# Altium PCB PCB1.PcbDoc
Units mil, origin at the board's own origin, x right, y up, seen from the top; angles counter-clockwise.
Board outline 2105 x 2180 mil, 2 copper layers (Top Layer, Bottom Layer); 22 components, 12 nets, 50 pads, 5 vias.
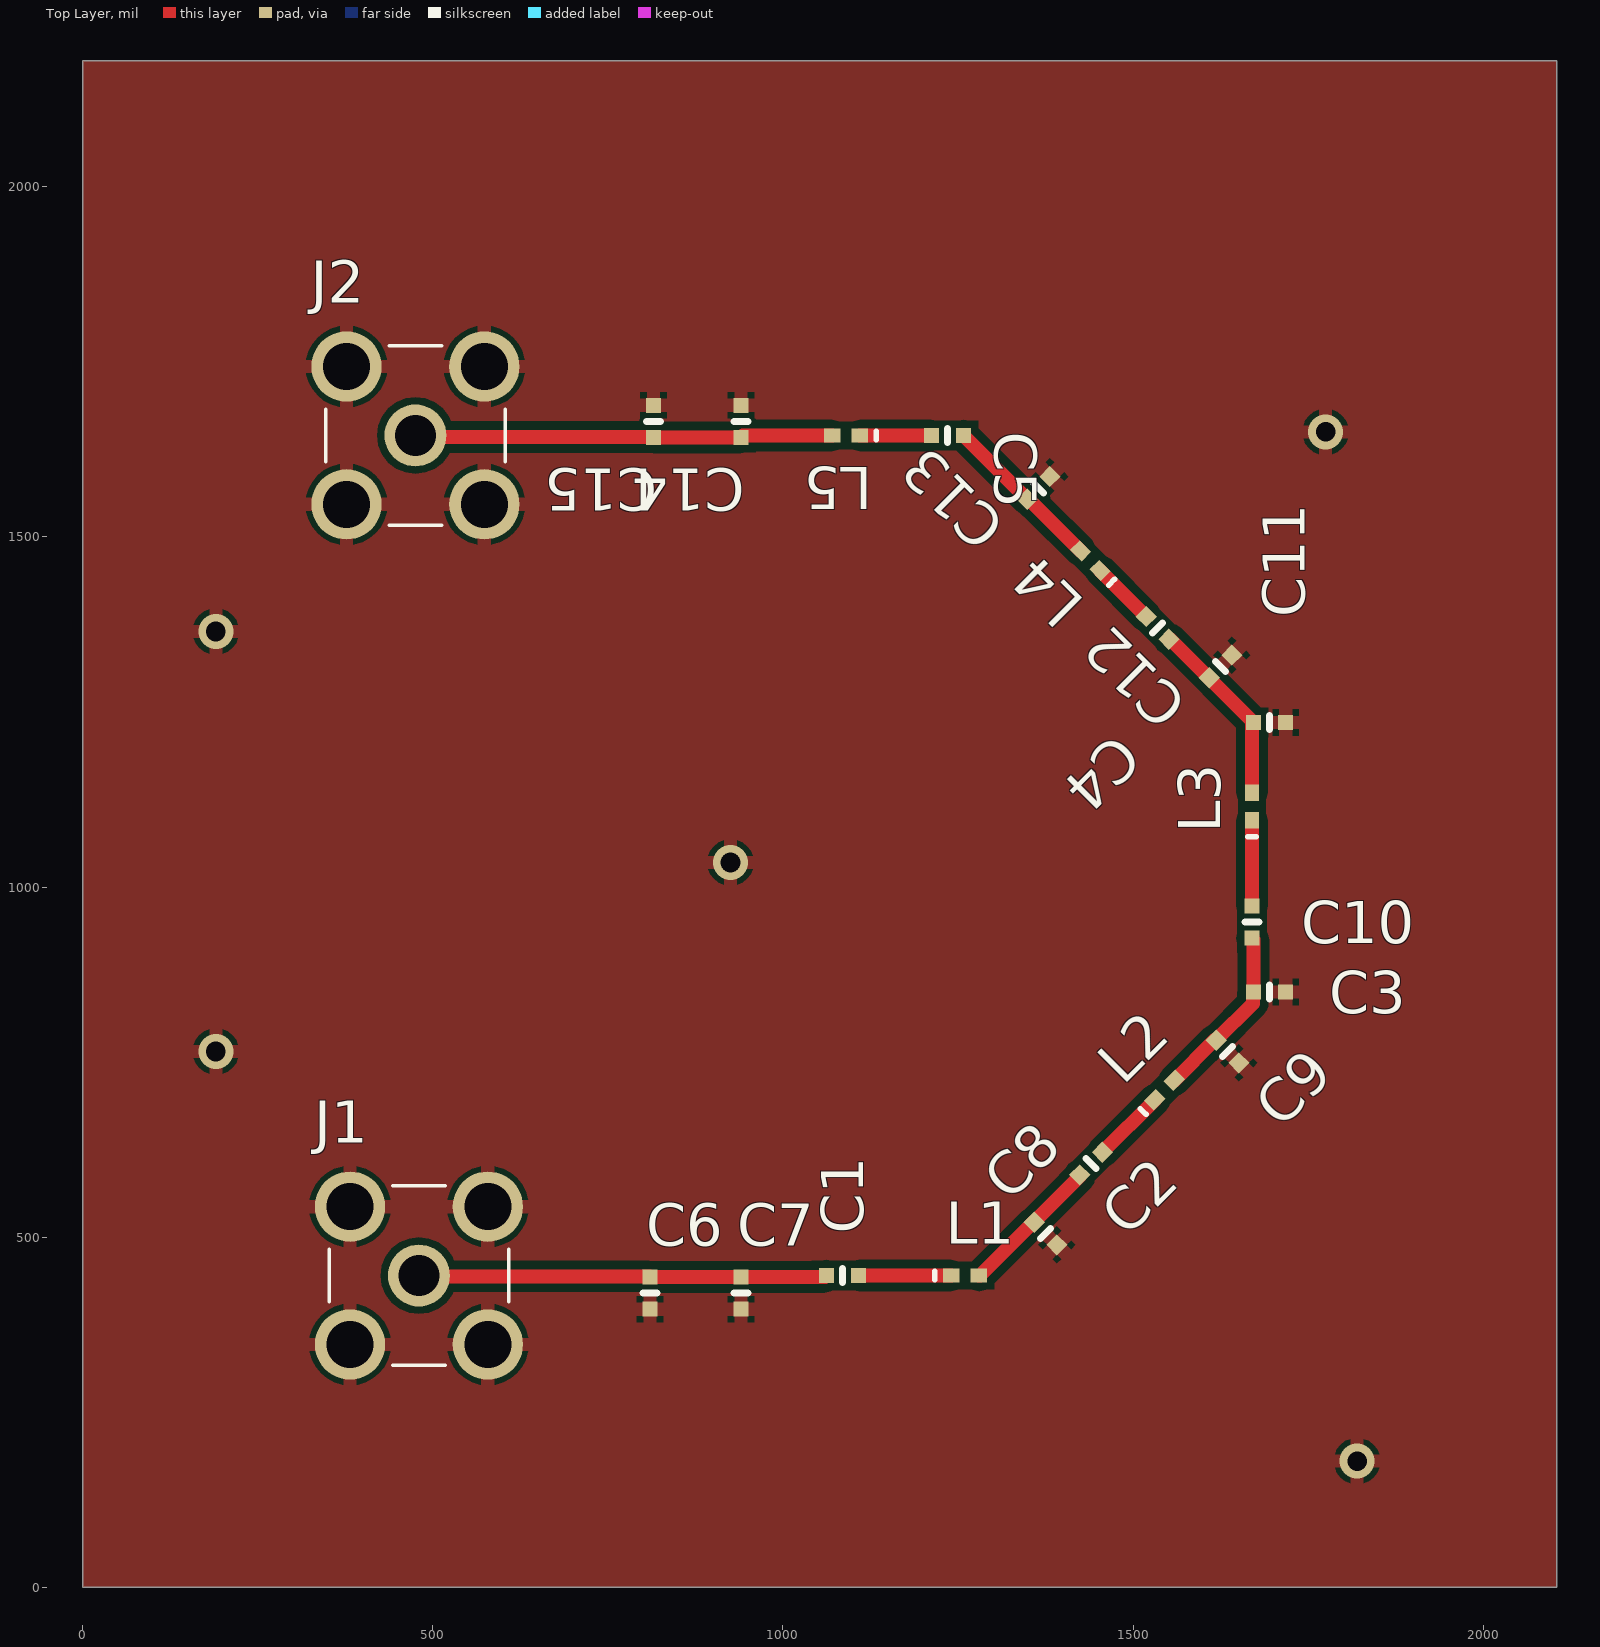
[diagram p0: Top Layer view]
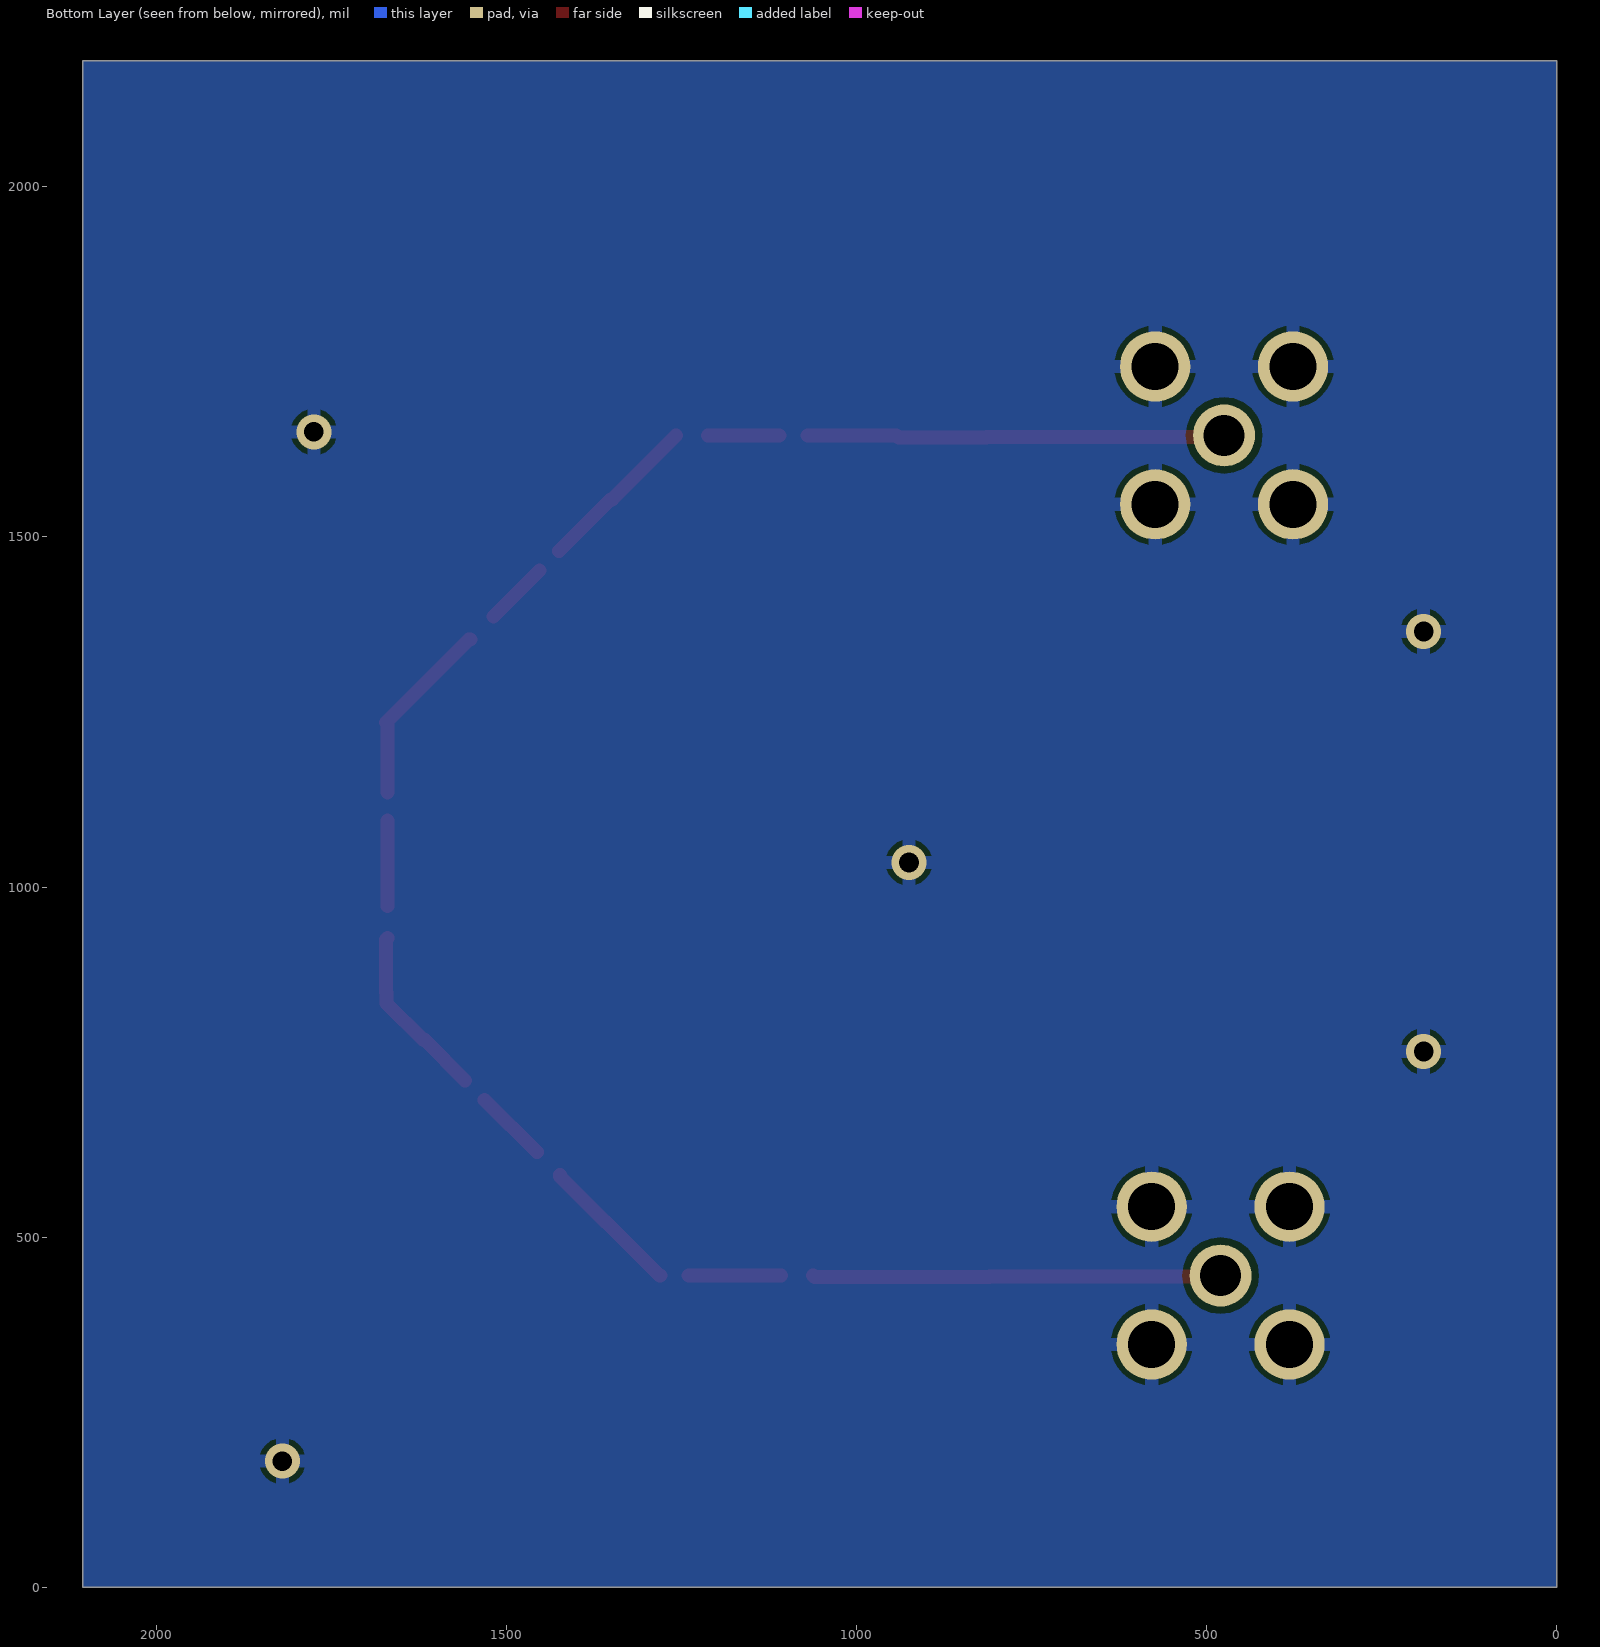
[diagram p1: Bottom Layer view, seen from below]
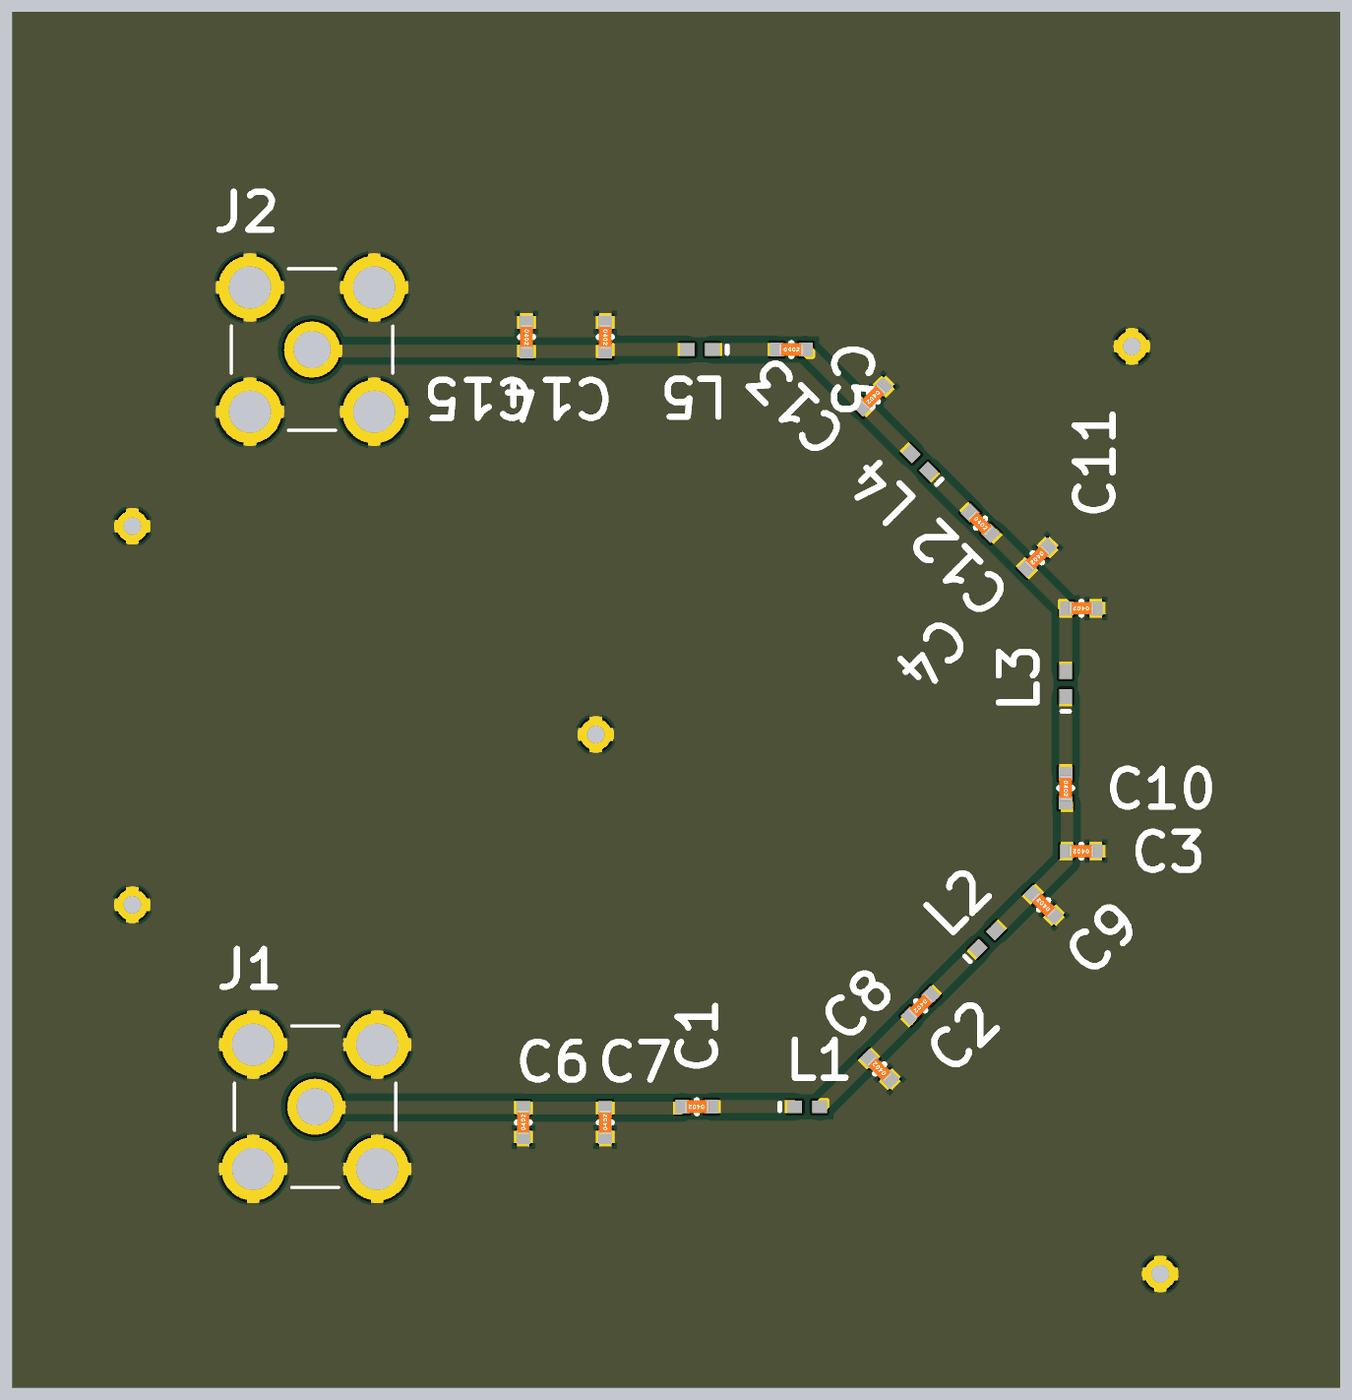
[diagram p2: 3D render of the assembled board from above, using the file's embedded part models]

## Layer stack, top to bottom
Top Solder: solder mask 0.4, Solder Resist, Dk 3.5
Top Layer: signal copper 1.4
Dielectric 1: dielectric 12.6, FR-4, Dk 4.8
Bottom Layer: signal copper 1.4
Bottom Solder: solder mask 0.4, Solder Resist, Dk 3.5

## Board outline
0,0 2105,0 2105,2180 0,2180

## Design rules (kind name [scope] priority, off if disabled: settings)
Clearance [All] p1: gap=10 ignorepadtopadclearanceinfootprint=FALSE except(0: Arc-Hole Track-Hole SMDPad-Hole THPad-Hole Via-Hole Fill-Hole Poly-Hole Region-Hole Text-Hole; 11.81: Arc-Via Arc-Fill Arc-Poly Arc-Region Track-Via Track-Fill Track-Poly Track-Region)
HoleSize [All] p1: absolutevalues=TRUE maxlimit=118.11 minlimit=27.56 maxpercent=80.000 minpercent=20.000
MinimumSolderMaskSliver [All] p1: minsoldermaskwidth=4.92
PlaneConnect [All] p1: planeconnectstyle=Relief reliefexpansion=20 reliefentries=4 reliefconductorwidth=12 reliefairgap=10
PolygonConnect [All] p1: connectstyle=Relief reliefconductorwidth=19.68 reliefentries=4 polygonreliefangle="90 Angle" airgapwidth=7.87
RoutingVias [All] p1: holewidth=27.56 width=62.99 viastyle="Through Hole" minholewidth=27.56 minwidth=62.99 maxholewidth=27.56 maxwidth=62.99
SilkToSilkClearance [All] p1: silktosilkclearance=4.72
SilkToSolderMaskClearance [IsPad] p1: minsilkscreentomaskgap=3.94 clearancetoexposedcopper=TRUE
SolderMaskExpansion [All] p1: expansion=4 istentingtop=FALSE
Width [All] p1: maxlimit=120 minlimit=12 preferedwidth=20
25 further rules are at their usual default settings.

## Components (designator, comment, footprint, x,y, rotation, side; value= is the part's Value field where it differs from the comment)
C1 "33pF" SMD-0402C 1085,445 r90 top
C2 "27pF" SMD-0402C 1440,605 r135 top
C3 "27pF" SMD-0402C 1670,950 r180 top
C4 "27pF" SMD-0402C 1535,1370 r225 top
C5 "33pF" SMD-0402C 1235,1645 r270 top
C6 "100pF" SMD-0402C 810,420 r0 top
C7 "100pF" SMD-0402C 940,420 r0 top
C8 "2.7nF" SMD-0402C 1375,505 r45 top value=2700pF
C9 "1.5nF" SMD-0402C 1695,850 r90 top value=1500pF
C10 "1.5nF" SMD-0402C 1635,765 r45 top value=1500pF
C11 "1.5nF" SMD-0402C 1695,1235 r90 top value=1500pF
C12 "1.5nF" SMD-0402C 1625,1315 r135 top value=1500pF
C13 "2.7nF" SMD-0402C 1365,1570 r135 top value=2700pF
C14 "100pF" SMD-0402C 940,1665 r180 top
C15 "100pF" SMD-0402C 815,1665 r180 top
J1 "IN" LPRS_SMACONNECTOR 480,445 r0 top
J2 "OUT" LPRS_SMACONNECTOR 475,1645 r0 top
L1 "10nH" 0402-A 1260,445 r0 top value=10mH
L2 "10nH" 0402-A 1545,710 r45 top value=10mH
L3 "10nH" 0402-A 1670,1115 r90 top value=10mH
L4 "10nH" 0402-A 1438.92,1466.08 r135 top value=10mH
L5 "10nH" 0402-A 1090,1645 r180 top value=10mH

## Footprints (in the part's own frame and the unit in brackets; to place one, negate y for a bottom-side part, rotate by r counter-clockwise, add the part's x,y. Pads: shape width x height; smd on the part's side, far side on the other; paste and mask are expansions set on the pad)
0402-A [mm] "Chip Inductor, Body 1.0x0.5mm, IPC High Density"
  rect 0.6x0.5 smd: 1(-0.5,0) 2(0.5,0)
  silkscreen extent -1.1,-0.15 -1.1,0.15, body extent -0.55,-0.3 0.55,0.3, height 0.55
LPRS_SMACONNECTOR [mm]
  round 2.25 hole 1.5: 1(0,0)
  round 2.55 hole 1.7: 2(2.5,2.5) 3(2.5,-2.5) 4(-2.5,-2.5) 5(-2.5,2.5)
  silkscreen extent -3.25,-3.25 3.25,3.25
SMD-0402C [mm]
  rect 0.55x0.55 smd: 1(0,0.584) 2(0,-0.584)
  silkscreen extent -0.25,0 0.25,0, body extent -0.25,-0.51 0.25,0.51, height 0.51

## Part data
C1 C5: library part GCM1555C1H330JA16D, "CAP CER 33PF 50V NP0 0402", Digi-Key Part Number=490-11148-1-ND, Manufacturer="Murata Electronics North America", Operating Temperature="-55°C ~ 125°C", Package / Case="0402 (1005 Metric)", Ratings=AEC-Q200, Temperature Coefficient="C0G, NP0", Tolerance=±5%, Voltage=50V, @ qty=0, Applications=Automotive, Datasheets=http://www.murata.com/~/media/webrenewal/support/library/catalog/products/capacitor/mlcc/c03e.ashx, Factory Stock=0, Features=-, Height - Seated (Max)=-, Image=//media.digikey.com/Renders/Murata%20Renders/ZRB-SERIES-0402.jpg, Lead Spacing=-, Lead Style=-, Minimum Quantity=1, Mounting Type="Surface Mount, MLCC", Packaging="Cut Tape (CT)", Part Number=GCM1555C1H330JA16D, Part Status=Active, Quantity Available=57000, Series=GCM, Size / Dimension="0.039\" L x 0.020\" W (1.00mm x 0.50mm)", Thickness (Max)="0.022\" (0.55mm)", Unit Price (USD)=0.1
C2 C3 C4: library part GCM1555C1H270JA16D, "CAP CER 27PF 50V NP0 0402", Digi-Key Part Number=490-12651-1-ND, Manufacturer="Murata Electronics North America", Operating Temperature="-55°C ~ 125°C", Package / Case="0402 (1005 Metric)", Ratings=AEC-Q200, Temperature Coefficient="C0G, NP0", Tolerance=±5%, Voltage=50V, @ qty=0, Applications=Automotive, Datasheets=http://www.murata.com/~/media/webrenewal/support/library/catalog/products/capacitor/mlcc/c03e.ashx, Factory Stock=0, Features=-, Height - Seated (Max)=-, Image=//media.digikey.com/Renders/Murata%20Renders/ZRB-SERIES-0402.jpg, Lead Spacing=-, Lead Style=-, Minimum Quantity=1, Mounting Type="Surface Mount, MLCC", Packaging="Cut Tape (CT)", Part Number=GCM1555C1H270JA16D, Part Status=Active, Quantity Available=8011, Series=GCM, Size / Dimension="0.039\" L x 0.020\" W (1.00mm x 0.50mm)", Thickness (Max)="0.022\" (0.55mm)", Unit Price (USD)=0.1
C6 C7 C14 C15: library part GCM1555C1H101JA16D, "CAP CER 100PF 50V NP0 0402", Digi-Key Part Number=490-10669-1-ND, Manufacturer="Murata Electronics North America", Operating Temperature="-55°C ~ 125°C", Package / Case="0402 (1005 Metric)", Ratings=AEC-Q200, Temperature Coefficient="C0G, NP0", Tolerance=±5%, Voltage=50V, @ qty=0, Applications=Automotive, Datasheets=http://www.murata.com/~/media/webrenewal/support/library/catalog/products/capacitor/mlcc/c03e.ashx, Factory Stock=0, Features=-, Height - Seated (Max)=-, Image=//media.digikey.com/Renders/Murata%20Renders/ZRB-SERIES-0402.jpg, Lead Spacing=-, Lead Style=-, Minimum Quantity=1, Mounting Type="Surface Mount, MLCC", Packaging="Cut Tape (CT)", Part Number=GCM1555C1H101JA16D, Part Status=Active, Quantity Available=61397, Series=GCM, Size / Dimension="0.039\" L x 0.020\" W (1.00mm x 0.50mm)", Thickness (Max)="0.022\" (0.55mm)", Unit Price (USD)=0.1
C8 C13: library part GRM1557U1A272JA01D, "CAP CER 2700PF 10V U2J 0402", Digi-Key Part Number=490-6275-1-ND, Manufacturer="Murata Electronics North America", Operating Temperature="-55°C ~ 125°C", Package / Case="0402 (1005 Metric)", Ratings=-, Temperature Coefficient=U2J, Tolerance=±5%, Voltage=10V, @ qty=0, Applications="General Purpose", Datasheets=http://www.murata.com/~/media/webrenewal/support/library/catalog/products/capacitor/mlcc/c02e.pdf, Factory Stock=0, Features=-, Height - Seated (Max)=-, Image=//media.digikey.com/Renders/Murata%20Renders/ZRB-SERIES-0402.jpg, Lead Spacing=-, Lead Style=-, Minimum Quantity=1, Mounting Type="Surface Mount, MLCC", Packaging="Cut Tape (CT)", Part Number=GRM1557U1A272JA01D, Part Status=Active, Quantity Available=21278, Series=GRM, Size / Dimension="0.039\" L x 0.020\" W (1.00mm x 0.50mm)", Thickness (Max)="0.022\" (0.55mm)", Unit Price (USD)=0.2
C9 C10 C11 C12: library part GCM155R71H152KA37D, "CAP CER 1500PF 50V X7R 0402", Digi-Key Part Number=490-8000-1-ND, Manufacturer="Murata Electronics North America", Operating Temperature="-55°C ~ 125°C", Package / Case="0402 (1005 Metric)", Ratings=AEC-Q200, Temperature Coefficient=X7R, Tolerance=±10%, Voltage=50V, @ qty=0, Applications=Automotive, Datasheets=http://www.murata.com/~/media/webrenewal/support/library/catalog/products/capacitor/mlcc/c03e.ashx, Factory Stock=0, Features=-, Height - Seated (Max)=-, Image=//media.digikey.com/Renders/Murata%20Renders/ZRB-SERIES-0402.jpg, Lead Spacing=-, Lead Style=-, Minimum Quantity=1, Mounting Type="Surface Mount, MLCC", Packaging="Cut Tape (CT)", Part Number=GCM155R71H152KA37D, Part Status=Active, Quantity Available=79896, Series=GCM, Size / Dimension="0.039\" L x 0.020\" W (1.00mm x 0.50mm)", Thickness (Max)="0.022\" (0.55mm)", Unit Price (USD)=0.1
J1 J2: library part SMACONNECTOR, "SMA female RF coaxial connector for SMA male RF antennas.", Package=None, Availability=Unavailable, MP=SMACONNECTOR, Price=None
L1 L2 L3 L4 L5: library part Inductor, Code_IEC=1005, Code_JEITA=0402, LatestRevisionDate=29-May-2009, LatestRevisionNote="IPC-7351 Footprint Added.", PackageDescription="Chip Inductor", PackageReference=0402-A, Published=8-Jun-2000, Publisher="Altium Limited"

## Via types
v1: diameter 50, hole 28, Top Layer to Bottom Layer, 5 vias

## Nets (pads, with @x,y where several pads share a name; then routed paths per layer and width w, separated by ;. In a path a pad name is that pad's centre, name@x,y a point inside that pad or via, vN(x,y) a via of type N, cw(c..) or ccw(c..) an arc to the next point about the centre after c; other vN are vias at no path point)
GND: C6.2 C7.2 C8.2 C9.2 C10.2 C11.2 C12.2 C13.2 C14.2 C15.2 J1.2 J1.3 J1.4 J1.5 J2.2 J2.3 J2.4 J2.5
  other v1: 1820,180 190,765 925,1035 190,1365 1775,1650
NetC1_1: C1.1 C6.1 C7.1 J1.1 | length 583.7
  Top Layer w20: J1.1 481.17,443.83 809.17,443.83 C6.1 C7.1 1060,443 C1.1
NetC1_2: C1.2 L1.1 | length 132.3
  Top Layer w20: C1.2 L1.1
NetC2_1: C2.1 C8.1 L1.2 | length 205
  Top Layer w20: L1.2 1281.34,445 1357.6,521.26 C8.1 1423.74,586.26 C2.1
NetC2_2: C2.2 L2.1 | length 105.8
  Top Layer w20: C2.2 L2.1
NetC3_1: C3.1 C9.1 C10.1 L2.2 | length 252.2
  Top Layer w20: L2.2 1616.26,781.26 C10.1 1671.17,833.7 1671.17,849.17 C9.1 1672,925 C3.1
NetC3_2: C3.2 L3.1 | length 122.3
  Top Layer w20: C3.2 L3.1
NetC4_1: C4.1 C11.1 C12.1 L3.2 | length 271.1
  Top Layer w20: C4.1 1553.26,1353.74 C11.1 1670,1233 L3.2
NetC4_2: C4.2 L4.1 | length 93.2
  Top Layer w20: L4.1 C4.2
NetC5_1: C5.1 C13.1 L4.2 | length 235.7
  Top Layer w20: C5.1 1348.74,1554.26 C13.1 1351.26,1553.74 L4.2
NetC5_2: C5.2 L5.1 | length 102.3
  Top Layer w20: L5.1 C5.2
NetC14_1: C14.1 C15.1 J2.1 L5.2 | length 597.8
  Top Layer w20: J2.1 477.17,1642.83 814.17,1642.83 C15.1 C14.1 943,1645 L5.2

## Polygon pours and split planes (outlines as drawn)
GND on Top Layer "GND_L01_P000" (solid, pour order 0): 2105,2180 2105,0 0,0 0,2180
GND on Bottom Layer "GND_L02_P003" (solid, pour order 3): 2105,2180 2105,0 0,0 0,2180
no net on Bottom Layer "NONET_L02_P002" (solid, pour order 2): 2130,2095